# Altium PCB Tester_REV_0.PcbDoc (part 2 of 3)
Units mm, origin at the board's own origin, x right, y up, seen from the top; angles counter-clockwise.
Board outline 150 x 150 mm, 2 copper layers (Top Layer, Bottom Layer); 109 components, 101 nets, 433 pads, 87 vias.
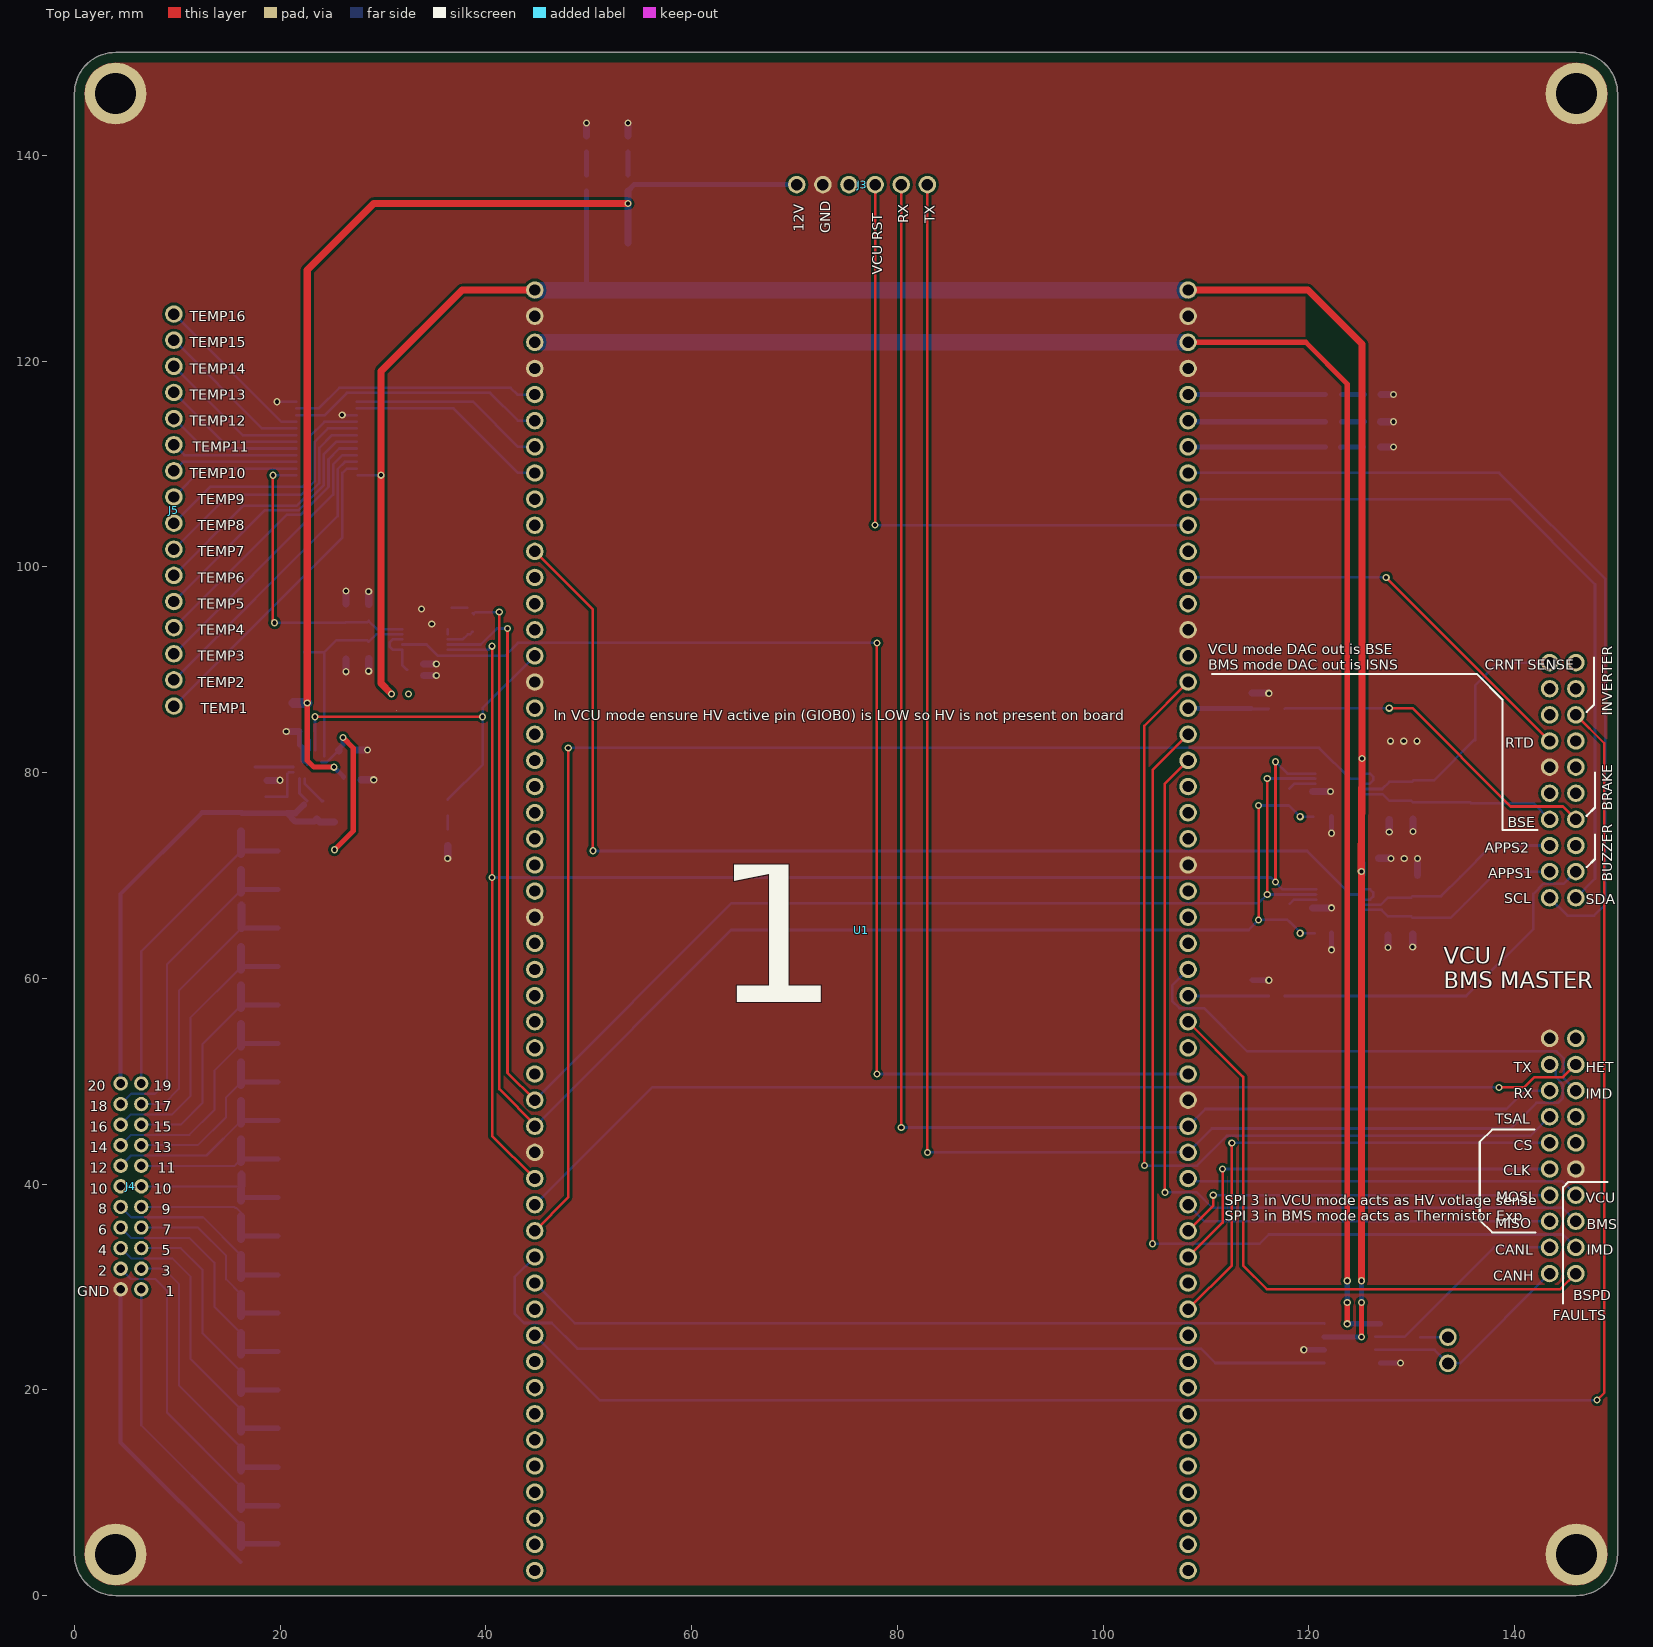
[diagram p0: Top Layer view]

## Part data (continued)
R20: library part 0603-665KR, "RES 665K OHM 1% 1/10W 0603", Case/Package=0603, Case Code (Metric)=1608, Manufacturer="Stackpole Electronics", Manufacturer Part Number=RMCF0603FT665K, Max Operating Temperature=155°C, Max Power Dissipation=100mW, Min Operating Temperature=-55°C, Resistance=665kR, Resistor Type="Thick Film", Supplier Part Number 1=RMCF0603FT665KDKR-ND, Temperature Coefficient=100ppm/°C, Tolerance=1%, Case Code (Imperial)=0603, ComponentLink1Description=https://www.seielect.com/Catalog/SEI-RMCF_RMCP.pdf?src-supplier=Digi-Key, ComponentLink1URL=https://www.seielect.com/Catalog/SEI-RMCF_RMCP.pdf?src-supplier=Digi-Key, ComponentLink2Description=http://www.seielect.com/Catalog/SEI-RMC.pdf?src-supplier=Future+Electronics, ComponentLink2URL=http://www.seielect.com/Catalog/SEI-RMC.pdf?src-supplier=Future+Electronics, ComponentLink3Description=https://www.seielect.com/catalog/SEI-RMCF_RMCP.pdf?src-supplier=Avnet, ComponentLink3URL=https://www.seielect.com/catalog/SEI-RMCF_RMCP.pdf?src-supplier=Avnet, Contact Plating=Tin,Matte, Features="Automotive AEC-Q200", Height=0.022inch, Lead Free="Lead Free", Length=0.061inch, Mount="Surface Mount", Number of Terminations=2, Packaging="Tape and Reel", Power Rating=100mW, Pricing 1="1=0.1, 10=0.015, 100=0.0059, 1000=0.00265, 2500=0.0023 (USD)", Radiation Hardening=No, Stock 1=14804, Supplier 1=Digi-Key, Width=0.031inch
R21: library part 0603-8.06KR, "RES SMD 8.06K OHM 1% 1/10W 0603", Case/Package=0603, Case Code (Metric)=1608, Manufacturer=Panasonic, Manufacturer Part Number=ERJ-3EKF8061V, Max Operating Temperature=155°C, Max Power Dissipation=100mW, Min Operating Temperature=-55°C, Package Quantity=1, Resistance=8.06kR, Resistor Type="Thick Film", Supplier Part Number 1=P8.06KHDKR-ND, Temperature Coefficient=100ppm/°C, Tolerance=1%, Voltage Rating=75V, Voltage Rating (DC)=50V, Case Code (Imperial)=0603, ComponentLink1Description=http://industrial.panasonic.com/www-data/pdf/AOA0000/AOA0000CE2.pdf?src-supplier=Avnet, ComponentLink1URL=http://industrial.panasonic.com/www-data/pdf/AOA0000/AOA0000CE2.pdf?src-supplier=Avnet, ComponentLink2Description=https://www.alliedelec.com/m/d/623f45ff1957d936ff56d46fd1c28cac.pdf?src-supplier=Allied+Electronics, ComponentLink2URL=https://www.alliedelec.com/m/d/623f45ff1957d936ff56d46fd1c28cac.pdf?src-supplier=Allied+Electronics, ComponentLink3Description=http://www.farnell.com/datasheets/1678782.pdf?src-supplier=Element14, ComponentLink3URL=http://www.farnell.com/datasheets/1678782.pdf?src-supplier=Element14, ComponentLink4Description=http://www.farnell.com/datasheets/1911175.pdf?src-supplier=Element14, ComponentLink4URL=http://www.farnell.com/datasheets/1911175.pdf?src-supplier=Element14, ComponentLink5Description=http://industrial.panasonic.com/www-data/pdf/AOA0000/AOA0000CE2.pdf?src-supplier=Avnet+Europe, ComponentLink5URL=http://industrial.panasonic.com/www-data/pdf/AOA0000/AOA0000CE2.pdf?src-supplier=Avnet+Europe, ComponentLink6Description=http://www.farnell.com/datasheets/1911175.pdf?src-supplier=Farnell, ComponentLink6URL=http://www.farnell.com/datasheets/1911175.pdf?src-supplier=Farnell, Contact Plating=Tin, Depth=0.8mm, Features="Automotive AEC-Q200", Height=0.022inch, Lead Free="Lead Free", Length=1.6mm, Military Standard=Not, Mount="Surface Mount", Number of Terminations=2, Packaging="Tape and Reel", Power Rating=100mW, Pricing 1="1=0.1, 10=0.032, 100=0.013, 1000=0.00583, 2500=0.00506 (USD)", Radiation Hardening=No, REACH SVHC=Unknown, Stock 1=296308, Supplier 1=Digi-Key, Termination=SMD/SMT, Width=0.8mm
R28: library part 0603-10.5KR, "RES SMD 10.5KOHM 0.5% 1/10W 0603", Case/Package=0603, Case Code (Metric)=1608, Manufacturer=Yageo, Manufacturer Part Number=RT0603DRE0710K5L, Max Operating Temperature=155°C, Max Power Dissipation=100mW, Min Operating Temperature=-55°C, Package Quantity=5000, Resistance=10.5kR, Resistor Type="Thin Film", Supplier Part Number 1=311-2399-6-ND, Temperature Coefficient=50ppm/°C, Tolerance=0.5%, Voltage Rating (DC)=50V, Case Code (Imperial)=0603, ComponentLink1Description=http://www.yageo.com/NewPortal/yageodocoutput?fileName=/pdf/R-Chip/PYu-RT_1-to-0.05_RoHS_L_5.pdf&src-supplier=Digi-Key, ComponentLink1URL=http://www.yageo.com/NewPortal/yageodocoutput?fileName=/pdf/R-Chip/PYu-RT_1-to-0.05_RoHS_L_5.pdf&src-supplier=Digi-Key, Features="Moisture Resistant", Height=0.022inch, Lead Free="Lead Free", Length=0.063inch, Number of Terminations=2, Packaging="Tape and Reel", Pricing 1="1=0.1, 10=0.092, 100=0.0356, 1000=0.01564, 2500=0.01351 (USD)", Stock 1=24502, Supplier 1=Digi-Key, Width=0.031inch
R35: library part 0603-9.5KR, "RES SMD 9.53K OHM 1% 1/10W 0603", Case/Package=0603, Case Code (Metric)=1608, Manufacturer=Yageo, Manufacturer Part Number=RC0603FR-0795K3L, Max Operating Temperature=155°C, Max Power Dissipation=100mW, Min Operating Temperature=-55°C, Package Quantity=5000, Resistance=95.3kR, Resistor Type="Thick Film", Supplier Part Number 1=311-95.3KHRDKR-ND, Temperature Coefficient=100ppm/°C, Tolerance=1%, Voltage Rating=50V, Working Voltage=75V, Case Code (Imperial)=0603, Depth=0.8mm, Features="Moisture Resistant", Height=0.022inch, Lead Free="Lead Free", Length=0.063inch, Military Standard=Not, Number of Terminations=2, Packaging="Tape and Reel", Power Rating=100mW, Pricing 1="1=0.1, 10=0.021, 100=0.0085, 1000=0.00382, 2500=0.00331 (USD)", Stock 1=131701, Supplier 1=Digi-Key, Termination=SMD/SMT, Voltage Rating (DC)=50V, Width=0.031inch
R42: library part 0603-2KR, "RES SMD 2K OHM 1% 1/4W 0603", Case/Package=0603, Case Code (Metric)=1608, Manufacturer="Vishay Dale", Manufacturer Part Number=CRCW06032K00FKEAHP, Max Operating Temperature=155°C, Max Power Dissipation=250mW, Min Operating Temperature=-55°C, Package Quantity=10, Resistance=2kR, Supplier Part Number 1=541-2.00KSDKR-ND, Temperature Coefficient=100ppm/°C, Tolerance=1%, Voltage Rating=75V, Case Code (Imperial)=0603, ComponentLink1Description=http://www.vishay.com/docs/20043/crcwhpe3.pdf?src-supplier=Digi-Key, ComponentLink1URL=http://www.vishay.com/docs/20043/crcwhpe3.pdf?src-supplier=Digi-Key, Composition="Thick Film", Contact Plating=Tin, Depth=0.85mm, Features="Automotive AEC-Q200", Height=0.45mm, Lead Free="Lead Free", Length=1.6mm, Military Standard=Not, Mount="Surface Mount", Number of Terminations=2, Packaging="Tape and Reel", Power Rating=250mW, Pricing 1="1=0.17, 10=0.142, 100=0.0553, 1000=0.02317, 2500=0.02124 (USD)", Radiation Hardening=No, Stock 1=23723, Supplier 1=Digi-Key, Termination=Solder, Weight=7.1E-05oz, Width=0.033inch
R43: library part 0603-665R, "RES SMD 665 OHM 1% 1/10W 0603", Case/Package=0603, Case Code (Metric)=1608, Manufacturer=Yageo, Manufacturer Part Number=RC0603FR-07665RL, Max Operating Temperature=155°C, Max Power Dissipation=100mW, Min Operating Temperature=-55°C, Package Quantity=1, Supplier Part Number 1=311-665HRDKR-ND, Temperature Coefficient=100ppm/°C, Tolerance=1%, Voltage Rating=75V, Voltage Rating (DC)=50V, Case Code (Imperial)=0603, ComponentLink1Description=http://www.yageo.com/documents/recent/PYu-RC_Group_51_RoHS_L_9.pdf?src-supplier=Digi-Key, ComponentLink1URL=http://www.yageo.com/documents/recent/PYu-RC_Group_51_RoHS_L_9.pdf?src-supplier=Digi-Key, ComponentLink2Description=http://www.yageo.com/documents/recent/PYu-RC0603_51_RoHS_L_4.pdf?src-supplier=Avnet, ComponentLink2URL=http://www.yageo.com/documents/recent/PYu-RC0603_51_RoHS_L_4.pdf?src-supplier=Avnet, ComponentLink3Description=http://www.yageo.com/documents/recent/PYu-RC_Group_51_RoHS_L_10.pdf?src-supplier=Digi-Key, ComponentLink3URL=http://www.yageo.com/documents/recent/PYu-RC_Group_51_RoHS_L_10.pdf?src-supplier=Digi-Key, ComponentLink4Description=http://www.yageo.com/documents/recent/PYu-RC0603_51_RoHS_L_4.pdf?src-supplier=Avnet+Europe, ComponentLink4URL=http://www.yageo.com/documents/recent/PYu-RC0603_51_RoHS_L_4.pdf?src-supplier=Avnet+Europe, Composition="Thick Film", Contact Plating=Tin,Matte, Depth=0.8mm, Features="Moisture Resistant", Height=0.022inch, Lead Free="Lead Free", Length=1.6mm, Military Standard=Not, Number of Terminations=2, Packaging="Tape and Reel", Power Rating=100mW, Pricing 1="1=0.1, 10=0.023, 100=0.0094, 1000=0.00421, 2500=0.00366 (USD)", Resistance=665R, Stock 1=143871, Supplier 1=Digi-Key, Termination=SMD/SMT, Weight=7.1E-05oz, Width=0.8mm
R44 R45 R46 R47: library part 0603-22R, "RES SMD 22 OHM 1% 1/10W", Case/Package=0603, Case Code (Metric)=1608, Manufacturer=Yageo, Manufacturer Part Number=RC0603FR-0722RL, Max Operating Temperature=155°C, Max Power Dissipation=100mW, Min Operating Temperature=-55°C, Package Quantity=1, Supplier Part Number 1=311-22.0HRDKR-ND, Temperature Coefficient=100ppm/°C, Tolerance=1%, Voltage Rating=50V, Case Code (Imperial)=0603, ComponentLink1Description=http://www.yageo.com/documents/recent/PYu-RC_Group_51_RoHS_L_10.pdf?src-supplier=Digi-Key, ComponentLink1URL=http://www.yageo.com/documents/recent/PYu-RC_Group_51_RoHS_L_10.pdf?src-supplier=Digi-Key, ComponentLink2Description=http://documents.rs-components.com/techlib://itc_doclist_GB.htm?stockno=5050369&src-supplier=RSComponents, ComponentLink2URL=http://documents.rs-components.com/techlib://itc_doclist_GB.htm?stockno=5050369&src-supplier=RSComponents, ComponentLink3Description=http://www.farnell.com/datasheets/2167052.pdf?src-supplier=Element14, ComponentLink3URL=http://www.farnell.com/datasheets/2167052.pdf?src-supplier=Element14, ComponentLink4Description=http://www.farnell.com/datasheets/443971.pdf?src-supplier=Element14, ComponentLink4URL=http://www.farnell.com/datasheets/443971.pdf?src-supplier=Element14, Composition="Thick Film", Depth=0.8mm, Features="Moisture Resistant", Height=0.022inch, Lead Free="Lead Free", Length=1.6mm, Military Standard=Not, Number of Pins=2, Number of Terminations=2, Packaging="Tape and Reel", Power Rating=100mW, Pricing 1="1=0.1, 10=0.023, 100=0.0094, 1000=0.00421, 2500=0.00366 (USD)", REACH SVHC="No SVHC", Resistance=22R, Stock 1=2467850, Supplier 1=Digi-Key, Termination=SMD/SMT, Voltage Rating (DC)=50V, Width=0.031inch
U1: library part "Hercules Launchpad", "LAUNCHPAD TMS570LS12X EVAL BRD", Manufacturer="Texas Instruments", Package Quantity=1, Supplier Part Number 1=296-41109-ND, ComponentLink1Description=http://www.ti.com/tool/LAUNCHXL2-TMS57012?keyMatch=LAUNCHXL2-TMS57012&tisearch=Search-EN&src-supplier=Avnet+Asia, ComponentLink1URL=http://www.ti.com/tool/LAUNCHXL2-TMS57012?keyMatch=LAUNCHXL2-TMS57012&tisearch=Search-EN&src-supplier=Avnet+Asia, ComponentLink2Description=http://www.ti.com/lit/pdf/spnu611?src-supplier=Digi-Key, ComponentLink2URL=http://www.ti.com/lit/pdf/spnu611?src-supplier=Digi-Key, ComponentLink3Description=http://www.ti.com/lit/pdf/spnu611?src-supplier=Mouser, ComponentLink3URL=http://www.ti.com/lit/pdf/spnu611?src-supplier=Mouser, ComponentLink4Description=http://www.ti.com/tool/LAUNCHXL2-TMS57012?keyMatch=LAUNCHXL2-TMS57012&tisearch=Search-EN&src-supplier=Avnet, ComponentLink4URL=http://www.ti.com/tool/LAUNCHXL2-TMS57012?keyMatch=LAUNCHXL2-TMS57012&tisearch=Search-EN&src-supplier=Avnet, Core Architecture=ARM, Evaluation Kit=Yes, Manufacturer Part Number=LAUNCHXL2-TMS57012, Number of Bits=32, Packaging=Bulk, Pricing 1="1=59.99 (USD)", REACH SVHC="No SVHC", Stock 1=26, Supplier 1=Digi-Key
U2 U3 U4: library part DAC-MCP48FVB02-E/UN, "IC DAC 8BIT V-OUT 10MSOP", Case/Package=MSOP, Manufacturer=Microchip, Manufacturer Part Number=MCP48FVB02-E/UN, Max Operating Temperature=125°C, Min Operating Temperature=-40°C, Supplier Part Number 1=MCP48FVB02-E/UN-ND, ComponentLink1Description=http://www.farnell.com/datasheets/2002391.pdf?src-supplier=Element14, ComponentLink1URL=http://www.farnell.com/datasheets/2002391.pdf?src-supplier=Element14, ComponentLink2Description=http://www.farnell.com/datasheets/2002391.pdf?src-supplier=Farnell, ComponentLink2URL=http://www.farnell.com/datasheets/2002391.pdf?src-supplier=Farnell, ComponentLink3Description=http://www.microchip.com/mymicrochip/filehandler.aspx?ddocname=en576860&src-supplier=Digi-Key, ComponentLink3URL=http://www.microchip.com/mymicrochip/filehandler.aspx?ddocname=en576860&src-supplier=Digi-Key, Differential Output=No, Interface=SPI, Number of Bits=8, Number of D/A Converters=2, Number of Pins=10, Packaging=Rail/Tube, Pricing 1="1=1.16, 25=0.97, 100=0.88 (USD)", REACH SVHC="No SVHC", Resolution=8b, Settling Time=7.8us, Stock 1=418, Supplier 1=Digi-Key
U5: library part "CAN TRAN-MCP2562T-E/SN", "IC TRANSCEIVER HALF 1/1 8SOIC", Case/Package=SOIC, Manufacturer=Microchip, Manufacturer Part Number=MCP2562T-E/SN, Max Operating Temperature=125°C, Max Supply Voltage=5.5V, Min Operating Temperature=-40°C, Min Supply Voltage=4.5V, Nominal Supply Current=85uA, Package Quantity=3300, Supplier Part Number 1=MCP2562T-E/SNDKR-ND, ComponentLink1Description=http://ww1.microchip.com/downloads/en/DeviceDoc/25167B.pdf?src-supplier=Digi-Key, ComponentLink1URL=http://ww1.microchip.com/downloads/en/DeviceDoc/25167B.pdf?src-supplier=Digi-Key, ComponentLink2Description=http://ww1.microchip.com/downloads/en/DeviceDoc/25167B.pdf?src-supplier=Avnet, ComponentLink2URL=http://ww1.microchip.com/downloads/en/DeviceDoc/25167B.pdf?src-supplier=Avnet, Data Rate=1Mbps, Lead Free="Lead Free", Mount="Surface Mount", Number of Pins=8, Number of Transceivers=1, Packaging="Tape and Reel", Pricing 1="1=0.9, 25=0.75, 100=0.68 (USD)", Propagation Delay=125ns, Radiation Hardening=No, Receiver Hysteresis=200mV, Stock 1=0, Supplier 1=Digi-Key, Turn-On Delay Time=125ns
U6: library part MUX-74HC4067, "IC MUX/DEMUX 1X16 24TSSOP", Manufacturer="Nexperia USA", Supplier Part Number 1=1727-2042-6-ND, ComponentLink1Description=https://assets.nexperia.com/documents/data-sheet/74HC_HCT4067.pdf?src-supplier=Digi-Key, ComponentLink1URL=https://assets.nexperia.com/documents/data-sheet/74HC_HCT4067.pdf?src-supplier=Digi-Key, Manufacturer Part Number=74HC4067PW,118, Pricing 1="1=0.87, 10=0.779, 25=0.7392, 100=0.6072, 250=0.5676, 500=0.5016, 1000=0.396 (USD)", Stock 1=7949, Supplier 1=Digi-Key
U7: library part "Boost Adj-280mA", "IC REG BOOST ADJ 280MA 16QFN", Case/Package="QFN EP", Manufacturer="Analog Devices / Linear Technology", Max Operating Temperature=85°C, Min Input Voltage=2.5V, Min Operating Temperature=-40°C, Output Current=280mA, Output Voltage=90V, Package Quantity=2500, Supplier Part Number 1=LT3482EUD#TRPBFDKR-ND, Switching Frequency=1.1MHz, ComponentLink1Description=http://www.linear.com/docs/18598?src-supplier=Digi-Key, ComponentLink1URL=http://www.linear.com/docs/18598?src-supplier=Digi-Key, ComponentLink2Description=http://datasheet.iiic.cc/linear_technology/LT3482EUD_TRPBF.pdf?src-supplier=IIIC, ComponentLink2URL=http://datasheet.iiic.cc/linear_technology/LT3482EUD_TRPBF.pdf?src-supplier=IIIC, Lead Free="Lead Free", Manufacturer Part Number=LT3482EUD#TRPBF, Number of Outputs=1, Number of Pins=16, Output Type=Adjustable, Packaging="Tape and Reel", Pricing 1="1=8.73, 25=4.8284 (USD)", Stock 1=2233, Supplier 1=Digi-Key, Synchronous Rectifier=No

## Free pads (board coordinates)
  round 6 hole 4: 0(4,146) 2(4,4) 3(146,4) 4(146,146)

## Via types
v1: diameter 0.7, hole 0.4, Top Layer to Bottom Layer, 87 vias

## Nets (pads, with @x,y where several pads share a name; then routed paths per layer and width w, separated by ;. In a path a pad name is that pad's centre, name@x,y a point inside that pad or via, vN(x,y) a via of type N, cw(c..) or ccw(c..) an arc to the next point about the centre after c; other vN are vias at no path point)
3V3: U1.3 U1.53 U5.5 | length 175.2
  Top Layer w0.5: U1.53@108.251,121.82 119.68,121.82 123.72,117.78 v1(123.72,30.6) ; v1(123.72,26.42) v1(123.72,28.48)
  Bottom Layer w0.5: v1(123.72,26.42) U5.5@126.944,26.42 ; v1(123.72,28.48) v1(123.72,30.6)
  Bottom Layer w1.6: U1.3@44.751,121.82 U1.53@108.251,121.82
5V: 5V.1 C1.2 C2.2 C3.2 R43.2 U1.1 U1.51 U2.1 U2.3 U3.1 U3.3 U4.1 U4.3 U5.3 U6.24 | length 262.9
  Top Layer w0.5: v1(125.089,70.389) v1@125.1,70.378 ; v1(125.1,25.15) v1(125.1,28.48)
  Top Layer w0.7: v1(30.835,87.645) 29.8,88.68 v1(29.8,108.905) 29.8,119 37.7,126.9 U1.1@44.751,126.9 ; U1.51@108.251,126.9 119.9,126.9 125.145,121.655 v1(125.145,81.374) v1(125.089,70.389) ; v1(125.1,30.6) v1@125.1,70.378
  Bottom Layer w0.25: U6.24@27.55,108.905 v1(29.8,108.905) ; U4.3@31.85,92.944 30.939,92.944 30.64,92.644 30.64,92.244 30.94,91.944 U4.1@31.85,91.944 31.85,90.47 C3.2@32.34,89.979 ; U2.3@125.062,78.9 125.894,78.9 126.244,79.249 126.244,79.6 125.944,79.9 U2.1@125.062,79.9 125.062,82.982 C1.2@125.065,82.985 ; U3.3@125.133,67.65 125.944,67.65 126.244,67.949 126.244,68.349 125.943,68.65 U3.1@125.133,68.65 125.133,71.652 C2.2@125.144,71.663
  Bottom Layer w0.5: 5V.1@49.764,131.6 R43.2@49.764,136.54 ; 49.78,127 5V.1@49.78,131.585 ; U5.3@121.474,25.13 U5.3@121.494,25.15 v1(125.1,25.15) ; v1(125.1,28.48) v1(125.1,30.6)
  Bottom Layer w0.7: 125.144,70.01 C2.2@125.144,71.249
  Bottom Layer w1.6: U1.1@44.751,126.9 U1.51@108.251,126.9
  other v1: 32.467,87.645
12V: 12V.1 C10.2 J3.6 L1.1 R42.2 U7.11 U7.15 | length 115
  Top Layer w0.5: v1(22.635,86.76) 22.635,81.18 23.292,80.524 v1(25.241,80.524)
  Top Layer w0.7: v1(22.635,86.76) 22.635,128.835 29.1,135.3 v1(53.8,135.3)
  Bottom Layer w0.25: L1.1@21.276,86.499 L1.1@21.276,86.785 L1.1@21.301,86.76 ; v1(22.635,86.76) 22.635,83.413 22.896,83.153 U7.11@22.896,82.149 ; U7.15@24.021,80.524 v1@25.05,80.524 ; C10.2@26.175,79.399 C10.2@26.175,79.589
  Bottom Layer w0.5: v1(25.241,80.524) C10.2@26.175,79.589 ; R42.2@53.8,136.54 54.409,137.149 J3.6@70.211,137.149
  Bottom Layer w0.7: 12V.1@53.8,131.485 R42.2@53.8,136.54
  Bottom Layer w1: L1.1@21.301,86.76 v1(22.635,86.76)
APPS_1: APP1.1 C7.2 J2.12 R14.2 U3.5 | length 20.4
  Bottom Layer w0.25: U3.5@125.133,66.65 127.053,66.65 R14.2@127.678,66.025 129.928,66.025 C7.2@130.078,65.875 133.769,65.875 APP1.1@135.143,67.249 138.264,70.37 J2.12@143.397,70.37
APPS_2: APP2.1 C6.1 J2.13 R13.1 U3.4 | length 20.7
  Bottom Layer w0.25: U3.4@125.133,67.15 126.994,67.15 R13.1@127.678,67.834 129.928,67.834 C6.1@130.078,67.984 132.844,67.984 APP2.1@134.717,69.857 ; APP2.1@134.709,69.864 137.754,72.91 J2.13@143.397,72.91
Batt_Volt: C13.2 C15.2 CELL20.1 J4.12 R19.2 R20.2 R22.2 U7.4 | length 47.5
  Bottom Layer w0.3: U7.4@21.896,79.399 21.896,77.959 R19.2@22.619,77.236
  Bottom Layer w0.4: J4.12@4.5,49.779 4.5,68.184 CELL20.1@12.43,76.115
  Bottom Layer w0.5: CELL20.1@12.43,76.115 R22.2@16.3,76.115 ; R22.2@16.25,76.045 20.671,76.045 C13.2@20.673,76.043
  Bottom Layer w0.6: R19.2@22.307,76.872 21.478,76.043 C13.2@20.673,76.043 21.483,75.234 23.34,75.234 C15.2@23.565,75.459
  Bottom Layer w0.7: C15.2@23.565,75.459 23.84,75.184 R20.2@25.276,75.184
BMS_FLT: J1.8 U1.69 | length 84
  Top Layer w0.25: v1(106,39.2) 106,78.93 U1.69@108.251,81.18
  Bottom Layer w0.25: v1(106,39.2) 109.1,39.2 110.6,37.7 144.622,37.7 J1.8@145.937,36.385
BMS_MODE: R45.2 U1.55 | length 13.4
  Bottom Layer w0.5: U1.55@108.251,116.755 R45.2@121.62,116.755